# Altium PCB 转接板.PcbDoc
Units mil, origin at the board's own origin, x right, y up, seen from the top; angles counter-clockwise.
Board outline 649.61 x 1181.1 mil, 2 copper layers (Top Layer, Bottom Layer), stack 61.756 mil thick; 6 components, 11 nets, 36 pads, 26 vias.
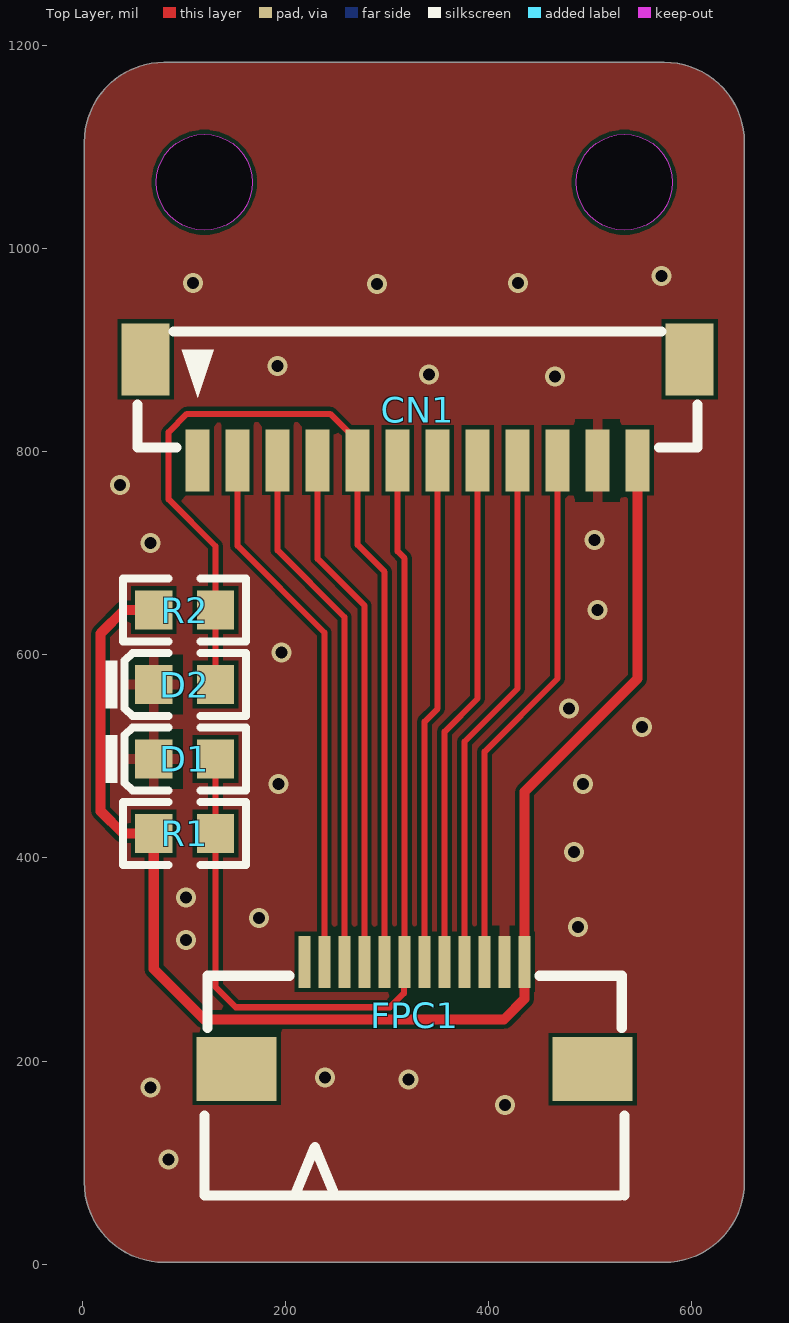
[diagram p0: Top Layer view]
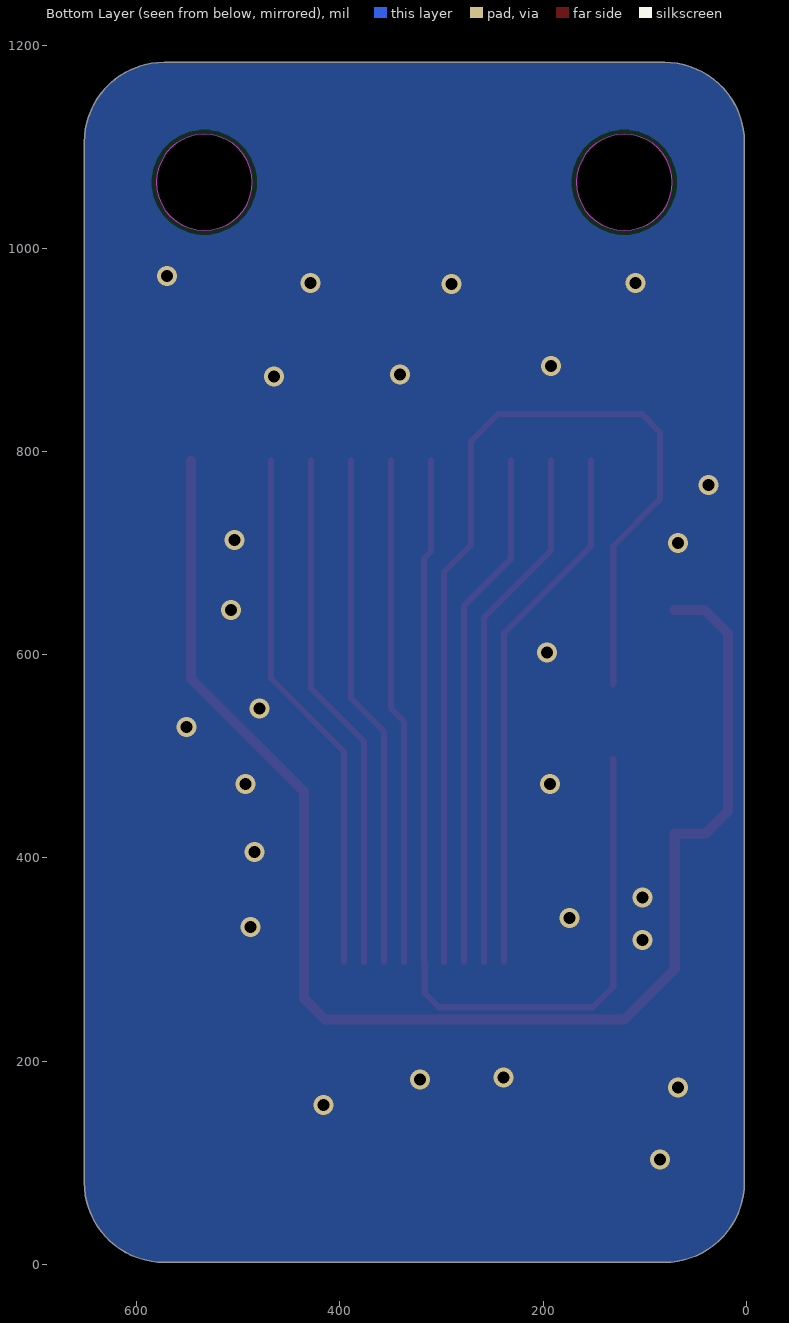
[diagram p1: Bottom Layer view, seen from below]
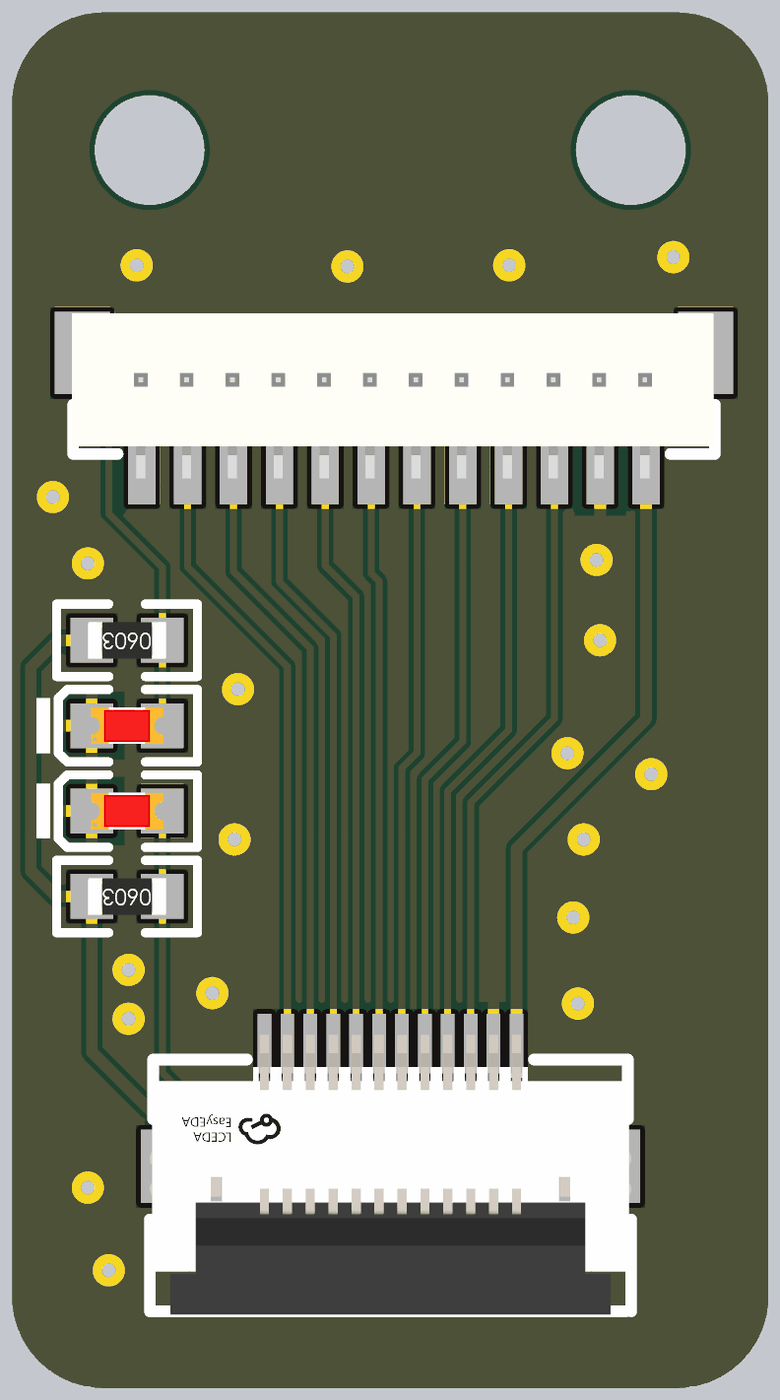
[diagram p2: 3D render of the assembled board from above, using the file's embedded part models]

## Layer stack, top to bottom
Top Solder: solder mask 1, SM-001, Dk 4
Top Layer: signal copper 1.378
Dielectric 1: core 59, Core-043, Dk 4.3
Bottom Layer: signal copper 1.378
Bottom Solder: solder mask 1, SM-001, Dk 4

## Board outline
80.71,1.97 cw(c80.71,80.71) 1.97,80.71 1.97,1104.33 cw(c80.71,1104.33) 80.71,1183.07 572.83,1183.07 cw(c572.83,1104.33) 651.57,1104.33 651.57,80.71 cw(c572.83,80.71) 572.83,1.97
cut-out: 533.46,1017.72 cw(c533.46,1064.96) 486.22,1064.96 cw(c533.46,1064.96) 533.46,1112.2 cw(c533.46,1064.96) 580.71,1064.96 cw(c533.46,1064.96)
cut-out: 120.08,1017.72 cw(c120.08,1064.96) 72.83,1064.96 cw(c120.08,1064.96) 120.08,1112.2 cw(c120.08,1064.96) 167.32,1064.96 cw(c120.08,1064.96)

## Design rules (kind name [scope] priority, off if disabled: settings)
Clearance [All] p1: gap=3.94 ignorepadtopadclearanceinfootprint=TRUE
HoleSize [All] p1: absolutevalues=TRUE maxlimit=9999 minlimit=1 maxpercent=80.000 minpercent=20.000
HoleToHoleClearance [All] p1 off: gap=10 allowstackedmicrovias=TRUE
MinimumSolderMaskSliver [All] p1 off: minsoldermaskwidth=10
PolygonConnect [All] p1: thpad.connectstyle=Direct thpad.reliefconductorwidth=10 thpad.reliefentries=4 thpad.polygonreliefangle="90 Angle" thpad.airgapwidth=10 smdpad.connectstyle=Relief smdpad.reliefconductorwidth=10 smdpad.reliefentries=4 smdpad.polygonreliefangle="90 Angle" smdpad.airgapwidth=10 via.connectstyle=Direct via.reliefconductorwidth=10 via.reliefentries=4 via.polygonreliefangle="90 Angle" via.airgapwidth=10
RoutingVias [All] p1: holewidth=11.81 width=19.68 viastyle="Through Hole" minholewidth=11.81 minwidth=19.68 maxholewidth=39330.71 maxwidth=39330.71
SilkToSilkClearance [All] p1 off: silktosilkclearance=10
SilkToSolderMaskClearance [IsPad] p1 off: minsilkscreentomaskgap=10 clearancetoexposedcopper=TRUE
SolderMaskExpansion [All] p1: expansion=4 istentingtop=FALSE
Width [All] p1: maxlimit=9999 minlimit=4 preferedwidth=8
25 further rules are at their usual default settings.

## Components (designator, comment, footprint, x,y, rotation, side; value= is the part's Value field where it differs from the comment)
CN1 "BM12B-SRSS-TB(LF)(SN)" CONN-SMD_BM12B-SRSS-TB-LF-SN 330,841 r180 top
D1 "黄灯 0603" 0603_LED_S1 100.69,497.33 r0 top
D2 "红灯 0603" 0603_LED_S1 100.68,570.67 r0 top
FPC1 "AFC01-S12FCA-00" FPC-SMD_AFC01-S12FCA-00 327,245 r0 top
R1 "4.7KΩ (4701) ±1%" 0603_R 100.69,424 r180 top
R2 "4.7KΩ (4701) ±1%" 0603_R 100.69,644 r180 top

## Footprints (in the part's own frame and the unit in brackets; to place one, negate y for a bottom-side part, rotate by r counter-clockwise, add the part's x,y. Pads: shape width x height; smd on the part's side, far side on the other; paste and mask are expansions set on the pad)
0603_LED_S1 [mm]
  rect 0.93x0.98 smd: A(0.77,0) K(-0.77,0)
  silkscreen extent -1.97,-0.79 1.54,0.79, body extent -0.8,-0.4 0.8,0.4, height 0.6
0603_R [mm]
  rect 0.93x0.98 smd: 1(-0.77,0) 2(0.77,0)
  silkscreen extent -1.53,-0.79 1.54,0.79, body extent -0.85,-0.4 0.85,0.4, height 0.56
CONN-SMD_BM12B-SRSS-TB-LF-SN [mm]
  rect 0.6x1.55 smd: 1(5.5,1.263) 2(4.5,1.263) 3(3.5,1.263) 4(2.5,1.263) 5(1.5,1.263) 6(0.5,1.263) 7(-0.5,1.263) 8(-1.5,1.263) 9(-2.5,1.263) 10(-3.5,1.263) 11(-4.5,1.263) 12(-5.5,1.263)
  rect 1.2x1.8 smd: 13(-6.8,-1.263) 14(6.8,-1.263)
  silkscreen extent -7,-1.96 7,0.94, body extent -6.98,-2.13 7.03,1.47, height 4.3
FPC-SMD_AFC01-S12FCA-00 [mm]
  rect 0.3x1.3 smd: 1(-2.75,1.34) 2(-2.251,1.34) 3(-1.751,1.34) 4(-1.25,1.34) 5(-0.75,1.34) 6(-0.25,1.34) 7(0.251,1.34) 8(0.75,1.34) 9(1.249,1.34) 10(1.749,1.34) 11(2.25,1.34) 12(2.75,1.34)
  rect 2x1.6 smd: 13(-4.45,-1.34) 14(4.45,-1.34)
  silkscreen extent -5.25,-4.5 5.25,0.99, body extent -5.25,-4.57 5.25,1.53, height 2.01

## Part data
CN1: "插针结构:1x12P;间距:1mm;安装方式:立贴;行距:-;总PIN数:12P;排数:1;每排PIN数:12;参考系列:SH;额定电流:1A;触头材质:铜合金;触头镀层:锡;工作温度范围:-25℃~+85℃;", Current Rating (Max)=1A, JLCPCB Part Class=扩展库, LCSC Part Name="1x12P 间距:1mm 立贴 系列:SH", Manufacturer=JST, Operating Temperature Range=-25℃~+85℃, Add into BOM=yes, Contact Material=铜合金, Contact Plating=锡, Convert to PCB=yes, Datasheet=https://atta.szlcsc.com/upload/public/pdf/source/20200311/C495554_AC8A242B8341DC77B3B89EF00A1D25AF.pdf, Device=BM12B-SRSS-TB(LF)(SN), Manufacturer Part=BM12B-SRSS-TB(LF)(SN), Mounting Style=立贴, Name=BM12B-SRSS-TB(LF)(SN), Number of Pins=12P, Number of PINs Per Row=12, Number of Rows=1, Pins Structure=1x12P, Pitch=1mm, Reference Series=SH, Row Spacing=-, Supplier=LCSC, Supplier Footprint=SMD,P=1mm, Supplier Part=C160398, Symbol=BM12B-SRSS-TB(LF)(SN)
D1: library part "0603 黄灯", "发光二极管", Package=0603, SuppliersPartNumber=C72038, ComponentLink1Description=供应商链接, ComponentLink1URL=http://www.szlcsc.com/product/details_73147.html, Supplier=LC
D2: library part "0603 红灯", "发光二极管", Package=0603, SuppliersPartNumber=C2286, ComponentLink1Description=供应商链接, ComponentLink1URL=http://www.szlcsc.com/product/details_2659.html, Supplier=LC
FPC1: "间距:0.5mm;触点数量:12P;锁定特性:翻盖式;触点类型:下接;安装类型:卧贴;", JLCPCB Part Class=扩展库, LCSC Part Name="间距:0.5mm P数:12P 翻盖式 下接", Manufacturer=JS(钜硕电子), Add into BOM=yes, Contact Type=下接, Convert to PCB=yes, Datasheet=https://atta.szlcsc.com/upload/public/pdf/source/20190816/C413942_2A72D1AC756EAE17EEDF756A339D4500.pdf, Device=AFC01-S12FCA-00, FFC, FCB Thickness=0.3mm, Height Above Board=2mm, Locking Feature=翻盖式, Manufacturer Part=AFC01-S12FCA-00, Mounting Type=卧贴, Name=AFC01-S12FCA-00, Number of Contacts=12P, Pitch=0.5mm, Supplier=LCSC, Supplier Footprint=SMD,P=0.5mm,卧贴, Supplier Part=C262661, Symbol=AFC01-S12FCA-00
R1 R2: library part "0603 4.7KΩ (4701) 1%", "贴片电阻", Package=0603, SuppliersPartNumber=C23162, ComponentLink1Description=供应商链接, ComponentLink1URL=http://www.szlcsc.com/product/details_23889.html, Supplier=LC

## Via types
v1: diameter 19.68, hole 11.81, Top Layer to Bottom Layer, 26 vias

## Nets (pads, with @x,y where several pads share a name; then routed paths per layer and width w, separated by ;. In a path a pad name is that pad's centre, name@x,y a point inside that pad or via, vN(x,y) a via of type N, cw(c..) or ccw(c..) an arc to the next point about the centre after c; other vN are vias at no path point)
5V: CN1.12 FPC1.12 R1.2 R2.2 | length 1401.7
  Top Layer w10: R2.2 41,644 18,621 18,446 40,424 R1.2 70.37,290.63 120,241 415,241 435.27,261.27 FPC1.12 435.27,465.27 546.53,576.53 CN1.12
A: CN1.10 FPC1.10 | length 523.3
  Top Layer w6: FPC1.10 395.87,504.66 467.8,576.58 CN1.10
B: CN1.9 FPC1.9 | length 515.2
  Top Layer w6: FPC1.9 376.17,514.49 428.43,566.75 CN1.9
CLK: CN1.4 FPC1.4 | length 512.7
  Top Layer w6: CN1.4 231.57,694.42 277.77,648.23 FPC1.4
CSN: CN1.2 FPC1.2 | length 528.9
  Top Layer w6: CN1.2 152.84,707.16 238.37,621.63 FPC1.2
DO: CN1.3 FPC1.3 | length 520.8
  Top Layer w6: CN1.3 192.21,702.79 258.07,636.93 FPC1.3
GND: CN1.11 D1.K D2.K FPC1.11
  other v1: 85,103 416,157 67,174 321,182 239,184 102,319 488,332 174,341 102,361 484,406 193,473 493,473 551,529 479,547 196,602 507,644 67,710 504,713 37,767 465,874 341,876 192,884 290,965 109,966 429,966 570,973
MagDECn: CN1.5 D2.A FPC1.5 R2.1 | length 995.2
  Top Layer w6: D2.A 131,707 85,753 85,819 103,837 243.94,837 270.94,810 CN1.5 270.94,708.05 297.47,681.53 FPC1.5
MagINCn: CN1.6 D1.A FPC1.6 R1.1 | length 951.5
  Top Layer w6: D1.A R1.1 131,273 151,253 302.77,253 316.47,266.7 316.47,297.07 FPC1.6 317.17,694.83 310.31,701.69 CN1.6
PWM: CN1.7 FPC1.7 | length 498.8
  Top Layer w6: FPC1.7 336.87,534.21 349.69,547.03 CN1.7
Z: CN1.8 FPC1.8 | length 507
  Top Layer w6: FPC1.8 356.52,524.35 389.06,556.89 CN1.8
pads on no net: CN1.1 CN1.13 CN1.14 FPC1.1 FPC1.13 FPC1.14

## Polygon pours and split planes (outlines as drawn)
GND on Top Layer "GND_L01_P000" (solid, pour order 0): 80.71,1.97 cw(c80.71,80.71) 1.97,80.71 1.97,1104.33 cw(c80.71,1104.33) 80.71,1183.07 572.83,1183.07 cw(c572.83,1104.33) 651.57,1104.33 651.57,80.71 cw(c572.83,80.71) 572.83,1.97
GND on Bottom Layer "GND_L02_P001" (solid, pour order 1): 80.71,1.97 cw(c80.71,80.71) 1.97,80.71 1.97,1104.33 cw(c80.71,1104.33) 80.71,1183.07 572.83,1183.07 cw(c572.83,1104.33) 651.57,1104.33 651.57,80.71 cw(c572.83,80.71) 572.83,1.97

## Silkscreen, mask and mechanical layers (free items; w line width, h text height)
Mechanical 1:
  circle w3.94: c533.46,1064.96 r47.24
  circle w3.94: c120.08,1064.96 r47.24
  lines w3.94: 1.97,80.71 ccw(c80.71,80.71) 80.71,1.97 572.83,1.97 ccw(c572.83,80.71) 651.57,80.71 651.57,1104.33 ccw(c572.83,1104.33) 572.83,1183.07 80.71,1183.07 ccw(c80.71,1104.33) 1.97,1104.33 1.97,80.71